# Altium PCB PCB1.PcbDoc (part 1 of 2)
Units mm, origin at the board's own origin, x right, y up, seen from the top; angles counter-clockwise.
Board outline 192 x 86 mm, 2 copper layers (Top Layer, Bottom Layer), stack 1.671 mm thick; 53 components, 94 nets, 298 pads, 93 vias.
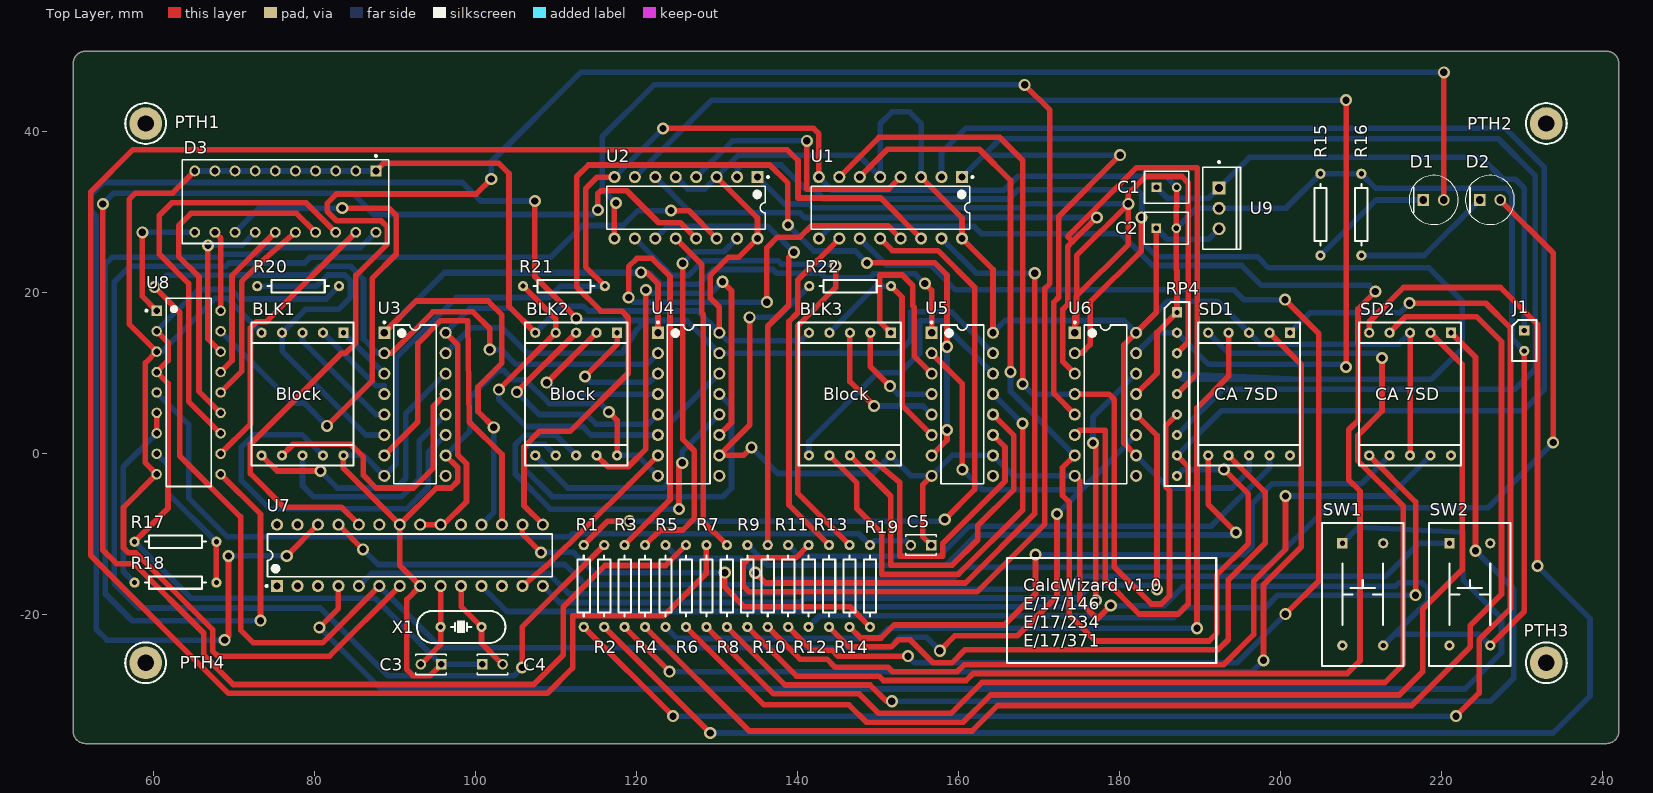
[diagram p0: Top Layer view]
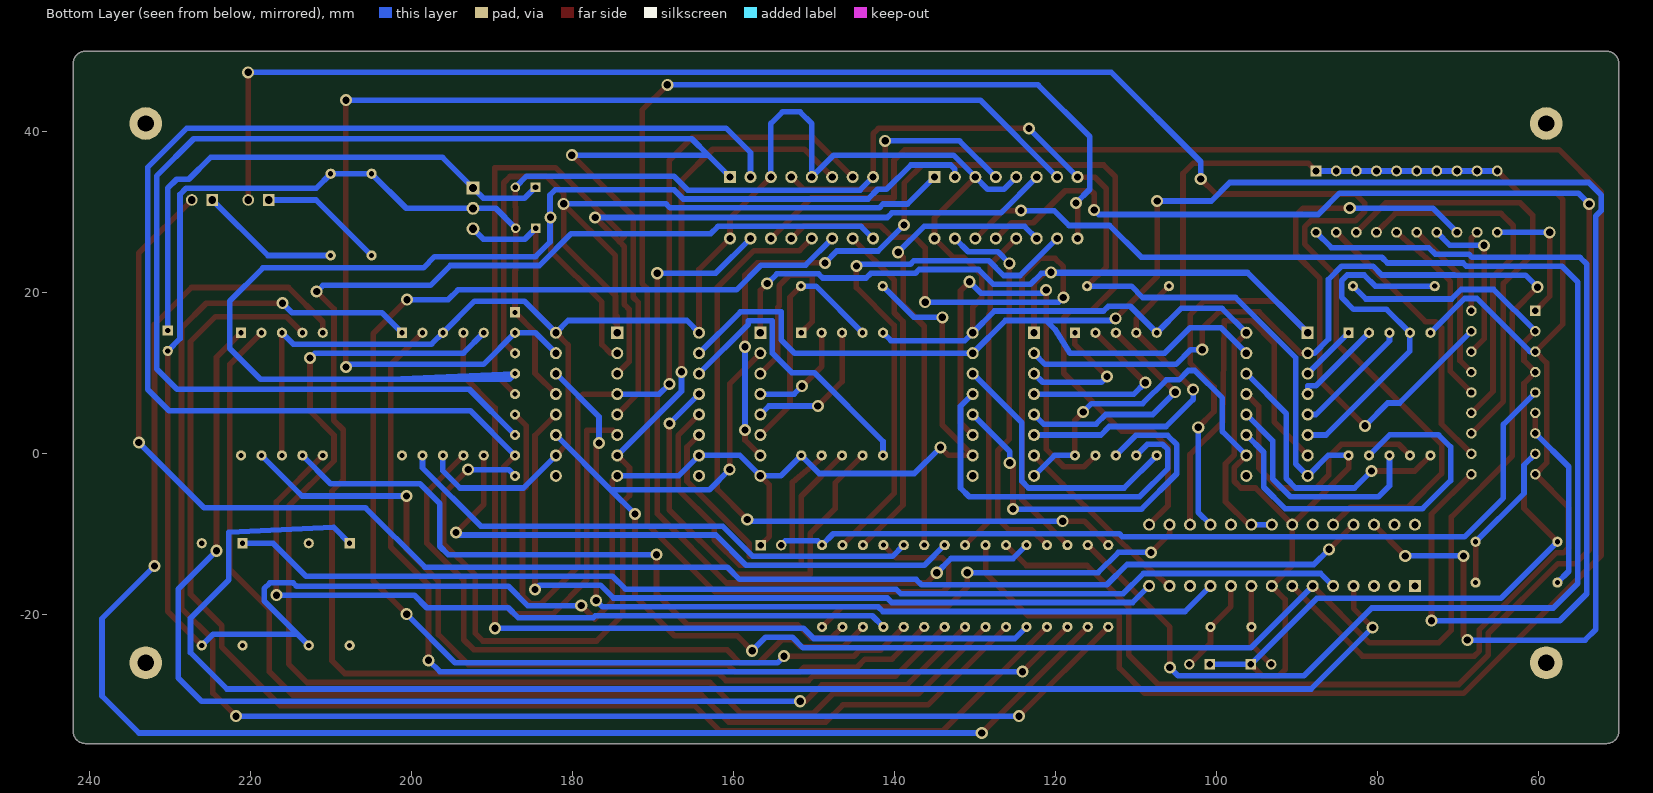
[diagram p1: Bottom Layer view, seen from below]

## Layer stack, top to bottom
Top Solder: solder mask 0.0102, Solder Resist, Dk 3.5
Top Layer: signal copper 0.0356
Dielectric 1: dielectric 1.6, FR-4, Dk 4.8
Bottom Layer: signal copper 0.0356
Bottom Solder: solder mask 0.0102, Solder Resist, Dk 3.5

## Board outline
50,-34.53 50,48.47 cw(c51.5,48.47) 51.5,49.97 240.5,49.97 cw(c240.5,48.47) 242,48.47 242,-34.53 cw(c240.5,-34.53) 240.5,-36.03 51.5,-36.03 cw(c51.5,-34.53)

## Design rules (kind name [scope] priority, off if disabled: settings)
Clearance [All] p1: gap=0.4 ignorepadtopadclearanceinfootprint=FALSE
PolygonConnect [All] p1: connectstyle=Relief reliefconductorwidth=0.254 reliefentries=4 polygonreliefangle="90 Angle" airgapwidth=0.254
RoutingVias [All] p1: holewidth=0.9 width=1.5 viastyle="Through Hole" minholewidth=0.9 minwidth=1.5 maxholewidth=0.9 maxwidth=1.5
SolderMaskExpansion [All] p1: expansion=0.102 istentingtop=FALSE
Width [All] p1: maxlimit=0.7 minlimit=0.7 preferedwidth=0.7
30 further rules are at their usual default settings.

## Components (designator, comment, footprint, x,y, rotation, side; value= is the part's Value field where it differs from the comment)
BLK1 "6x5 Block" BLOCK_6X5 78.48,15 r0 top locked
BLK2 "6x5 Block" BLOCK_6X5 112.48,15 r0 top locked
BLK3 "6x5 Block" BLOCK_6X5 146.48,15 r0 top locked
C1 "10uF" FP-RCE3DB-MFG 185.83,33.07 r0 top
C2 "10uF" FP-RCE3DB-MFG 185.79,27.99 r0 top
C3 "22 pF" KEMT-C315-THT-2 102.07,-26.2 r0 top
C4 "22 pF" KEMT-C315-THT-2 94.45,-26.2 r180 top
C5 "100 uF" KEMT-C315-THT-2 155.33,-11.38 r180 top
D1 "HLMP-4700" FP-HLMP-4700-MFG 219,31.5 r0 top locked
D2 "HLMP-4700" FP-HLMP-4700-MFG 226,31.5 r0 top locked
D3 "SSA-LXB10HW-GF/LP" FP-SSA-LXB10HW-GF-LP-MFG 76.35,31.29 r270 top locked
J1 "2-pin Connector" "2-PIN CONNECTOR" 230.26,15.29 r0 top
PTH1 "PCB Mounting Hole" "PTH 2MM" 59,41 r0 top locked
PTH2 "PCB Mounting Hole" "PTH 2MM" 233,41 r0 top locked
PTH3 "PCB Mounting Hole" "PTH 2MM" 233,-26 r0 top locked
PTH4 "PCB Mounting Hole" "PTH 2MM" 59,-26 r0 top
R1 "220R" CFR_400MIL 113.42,-11.38 r270 top
R2 "220R" CFR_400MIL 115.96,-21.54 r90 top
R3 "220R" CFR_400MIL 118.5,-11.38 r270 top
R4 "220R" CFR_400MIL 121.04,-21.54 r90 top
R5 "220R" CFR_400MIL 123.58,-11.38 r270 top
R6 "220R" CFR_400MIL 126.12,-21.54 r90 top
R7 "220R" CFR_400MIL 128.66,-11.38 r270 top
R8 "220R" CFR_400MIL 131.2,-21.54 r90 top
R9 "220R" CFR_400MIL 133.74,-21.54 r90 top
R10 "220R" CFR_400MIL 136.28,-21.54 r90 top
R11 "220R" CFR_400MIL 138.82,-21.54 r90 top
R12 "220R" CFR_400MIL 141.36,-21.54 r90 top
R13 "220R" CFR_400MIL 143.9,-11.38 r270 top
R14 "220R" CFR_400MIL 146.44,-21.54 r90 top
R15 "220R" CFR_400MIL 204.94,24.6 r90 top
R16 "220R" CFR_400MIL 210.02,24.6 r90 top
R17 "3K3" CFR_400MIL 67.78,-10.96 r180 top
R18 "2K2" CFR_400MIL 67.78,-16.04 r180 top
R19 "3K3" CFR_400MIL 148.98,-21.54 r90 top
R20 "3K3" CFR_400MIL 72.86,20.79 r0 top
R21 "3K3" CFR_400MIL 105.88,20.79 r0 top
R22 "3K3" CFR_400MIL 151.6,20.79 r180 top
RP4 "Resistor Pack 1k x 8" "RESISTOR PACK 1K X 8" 187.12,17.54 r0 top
SD1 "CA 7SD" "CA 7SD" 196.08,15 r0 top locked
SD2 "CA 7SD" "CA 7SD" 216.08,15 r0 top locked
SW1 "SPST (KRS-1273B-R)" "SPST KRS-1273B-R" 207.66,-11.15 r0 top locked
SW2 "SPST (KRS-1273B-R)" "SPST KRS-1273B-R" 220.96,-11.15 r0 top locked
U1 "SN74LS47N" N0016A 151.52,30.53 r270 top
U2 "SN74LS47N" N0016A 126.12,30.53 r270 top
U3 "SN74LS165AN" N0016A 92.45,6.11 r0 top
U4 "SN74LS165AN" N0016A 126.45,6.11 r0 top
U5 "SN74LS165AN" N0016A 160.45,6.11 r0 top
U6 "SN74HC595N" N0016A 178.23,6.11 r0 top
U7 "ATmega328P-PU" 28P3 91.83,-12.65 r90 top
U8 "LM3914N-1" FP-NFK0018A-MFG 64.331,7.58 r0 top
U9 "LM7805CT" FAIR-TO-220-3 192.35,30.46 r0 top
X1 "16 MHz Crystal" "CRYSTAL OSC TH" 95.64,-21.54 r0 top

## Footprints (in the part's own frame and the unit in brackets; to place one, negate y for a bottom-side part, rotate by r counter-clockwise, add the part's x,y. Pads: shape width x height; smd on the part's side, far side on the other; paste and mask are expansions set on the pad)
"2-PIN CONNECTOR" [mm]
  rect 1.27x1.27 hole 0.635: 1(0,0)
  round 1.27 hole 0.635: 2(0,-2.54)
  silkscreen extent -1.52,-3.81 1.52,1.27
28P3 [mm] "28-Pin Plastic Dual In-Line Package (PDIP)"
  rect 1.5x1.5 hole 0.9: 1(-3.81,16.51)
  round 1.5 hole 0.9: 2(-3.81,13.97) 3(-3.81,11.43) 4(-3.81,8.89) 5(-3.81,6.35) 6(-3.81,3.81) 7(-3.81,1.27) 8(-3.81,-1.27) 9(-3.81,-3.81) 10(-3.81,-6.35) 11(-3.81,-8.89) 12(-3.81,-11.43) 13(-3.81,-13.97) 14(-3.81,-16.51) 15(3.81,-16.51) 16(3.81,-13.97) 17(3.81,-11.43) 18(3.81,-8.89) 19(3.81,-6.35) 20(3.81,-3.81) 21(3.81,-1.27) 22(3.81,1.27) 23(3.81,3.81) 24(3.81,6.35) 25(3.81,8.89) 26(3.81,11.43) 27(3.81,13.97) 28(3.81,16.51)
  silkscreen extent -3.93,-17.7 2.65,17.93, body extent -3.6,-17.65 3.6,17.65, height 4.58
BLOCK_6X5 [mm]
  rect 1.27x1.27 hole 0.635: 1(5.08,0)
  round 1.27 hole 0.635: 2(2.54,0) 3(0,0) 4(-2.54,0) 5(-5.08,0) 6(-5.08,-15.24) 7(-2.54,-15.24) 8(0,-15.24) 9(2.54,-15.24) 10(5.08,-15.24)
  silkscreen extent -6.35,-16.51 6.35,1.27
"CA 7SD" [mil]
  rect 50x50 hole 25: 1(200,0)
  round 50 hole 25: 2(100,0) 3(0,0) 4(-100,0) 5(-200,0) 6(-200,-600) 7(-100,-600) 8(0,-600) 9(100,-600) 10(200,-600)
  silkscreen extent -250,-650 250,50
CFR_400MIL [mm]
  round 1.27 hole 0.635: 1(0,0) 2(10.16,0)
  silkscreen extent 1.27,-0.76 8.89,0.76
"CRYSTAL OSC TH" [mm]
  round 1.27 hole 0.635: 1(0,0) 2(5.08,0)
  silkscreen extent -2.96,-2 8.04,2
FAIR-TO-220-3 [mm] "FM, 3-Leads, Body 10.2x4.7mm, Pitch 2.54mm"
  rect 1.6x1.6 hole 1: 1(0,2.54)
  round 1.6 hole 1: 2(0,0) 3(0,-2.54)
  silkscreen extent -2.04,-5.1 2.66,5.87, body extent -2.04,-5.1 2.66,5.1, height 18.95
FP-HLMP-4700-MFG [mm]
  rect 1.45x1.45 hole 0.95 paste-1000 mask+0: 1(-1.27,0)
  round 1.45 hole 0.95 paste-1000 mask+0: 2(1.27,0)
  silkscreen extent -3.05,-3.05 3.05,3.05, body extent -3.15,-3.15 3.15,3.15, height 0.25
FP-NFK0018A-MFG [mm]
  rect 1.3x1.3 hole 0.8 paste-1000 mask+0: 1(-3.969,10.16)
  round 1.3 hole 0.8 paste-1000 mask+0: 2(-3.969,7.62) 3(-3.969,5.08) 4(-3.969,2.54) 5(-3.969,0) 6(-3.969,-2.54) 7(-3.969,-5.08) 8(-3.969,-7.62) 9(-3.969,-10.16) 10(3.969,-10.16) 11(3.969,-7.62) 12(3.969,-5.08) 13(3.969,-2.54) 14(3.969,0) 15(3.969,2.54) 16(3.969,5.08) 17(3.969,7.62) 18(3.969,10.16)
  silkscreen extent -5.37,-11.68 2.8,11.68, body extent -4.72,-12.04 4.72,12.04, height 0.25
FP-RCE3DB-MFG [mm]
  rect 1.2x1.2 hole 0.7 paste-1000 mask+0: 1(-1.25,0)
  round 1.2 hole 0.7 paste-1000 mask+0: 2(1.25,0)
  silkscreen extent -2.75,-2 2.75,2, body extent -2.85,-2.1 2.85,2.1, height 0.25
FP-SSA-LXB10HW-GF-LP-MFG [mm]
  rect 1.35x1.35 hole 0.85 paste-1000 mask+0: 1(-3.81,11.25)
  round 1.35 hole 0.85 paste-1000 mask+0: 2(-3.81,8.75) 3(-3.81,6.25) 4(-3.81,3.75) 5(-3.81,1.25) 6(-3.81,-1.25) 7(-3.81,-3.75) 8(-3.81,-6.25) 9(-3.81,-8.75) 10(-3.81,-11.25) 11(3.81,-11.25) 12(3.81,-8.75) 13(3.81,-6.25) 14(3.81,-3.75) 15(3.81,-1.25) 16(3.81,1.25) 17(3.81,3.75) 18(3.81,6.25) 19(3.81,8.75) 20(3.81,11.25)
  silkscreen extent -5.8,-12.83 5.2,12.82, body extent -5.31,-12.93 5.31,12.93, height 0.25
KEMT-C315-THT-2 [mm] "THD, 2-Leads, Body 3.81x2.54mm"
  rect 1.3x1.3 hole 0.8: 1(-1.27,0)
  round 1.3 hole 0.8: 2(1.27,0)
  silkscreen extent -1.9,-1.27 1.91,1.27, body extent -1.91,-1.27 1.91,1.27, height 4.66
N0016A [mm] "DIP, 16-Leads, Body 19.7x6.6mm, Pitch 2.54mm"
  rect 1.5x1.5 hole 0.9: 1(-3.81,8.89)
  round 1.5 hole 0.9: 2(-3.81,6.35) 3(-3.81,3.81) 4(-3.81,1.27) 5(-3.81,-1.27) 6(-3.81,-3.81) 7(-3.81,-6.35) 8(-3.81,-8.89) 9(3.81,-8.89) 10(3.81,-6.35) 11(3.81,-3.81) 12(3.81,-1.27) 13(3.81,1.27) 14(3.81,3.81) 15(3.81,6.35) 16(3.81,8.89)
  silkscreen extent -3.93,-9.85 2.65,10.32, body extent -3.95,-9.85 3.95,9.85, height 5.08
"PTH 2MM" [mil]
  round 160 hole 80: 1(0,0)
  silkscreen extent -100,-100 100,100
"RESISTOR PACK 1K X 8" [mm]
  rect 1.27x1.27 hole 0.635: 1(0,0)
  round 1.27 hole 0.635: 2(0,-2.54) 3(0,-5.08) 4(0,-7.62) 5(0,-10.16) 6(0,-12.7) 7(0,-15.24) 8(0,-17.78) 9(0,-20.32)
  silkscreen extent -1.52,-21.59 1.52,1.27
"SPST KRS-1273B-R" [mm]
  rect 1.27x1.27 hole 0.635: 1(0,0)
  round 1.27 hole 0.635: 2(0,-12.7) 3(5.08,-12.7) 4(5.08,0)
  silkscreen extent -2.54,-15.24 7.62,2.54

## Part data
BLK1 BLK2 BLK3: library part Block_6x5
C1 C2: library part CMP-06035-033894-1, "Cap Ceramic 10uF 25V X7R ±10% Radial 2.5mm +125°C Automotive Bulk (RCER71E106K3A2H03B)", Case/Package=Radial, Dielectric=X7R, Max Operating Temperature=125°C, Min Operating Temperature=-55°C, Package Quantity=500, Ratings=AEC-Q200, Resistor Type=Ceramic, Tolerance=10%, Voltage Rating=25V, Capacitance=10uF, Height=5mm, Height - Seated (Max)=0.197inch, Lead Diameter=0.5mm, Lead Pitch=0.098inch, Lead/Base Style=Straight, Length=0.217inch, Mount="Through Hole", Packaging=Bulk, Termination=Radial, Voltage Rating (DC)=25V, Width=0.157inch
C3 C4: library part CMP-1664-00008-1, "Capacitor, Ceramic, 22 pF, +/-10 %, 100 V, -55 to 125 degC, 2-Pin THD, RoHS, Bulk", Case\Package=TO-220, Max Input Voltage="40 V", Max Operating Temperature="125 degC", Max Ouput Current="1.5 A", Min Input Voltage="4.2 V", Min Operating Temperature="0 degC", Output Voltage="1.2 V", Package Quantity=50, ComponentLink1Description="Manufacturer URL", ComponentLink1URL=http://www.kemet.com/, ComponentLink2Description=Datasheet, ComponentLink2URL=http://capacitoredge.kemet.com/capedge2/DataSheet/Datasheet-C315C220K1G5TA.pdf?pn=C315C220K1G5TA{BULK}, DatasheetVersion=Aug-16, Height="9.28 mm", Length="10.28 mm", Mount="Through Hole", Output Current="1.5 A", Outputs=1, PackageDescription="2-Pin Through Hole Device, Body 3.81 x 2.54 mm", PackageReference=C315-THT-2, Packaging=Rail/Tube, Pins=3, Radiation Hardening=No, REACH SVHC="No SVHC", RoHSCompliant=true, Weight="0.08113 oz", Width="4.82 mm"
C5: library part CMP-1664-00008-1, "Capacitor, Ceramic, 100 uF, +/-10 %, 100 V, -55 to 125 degC, 2-Pin THD, RoHS, Bulk", Case\Package=TO-220, Max Input Voltage="40 V", Max Operating Temperature="125 degC", Max Ouput Current="1.5 A", Min Input Voltage="4.2 V", Min Operating Temperature="0 degC", Output Voltage="1.2 V", Package Quantity=50, ComponentLink1Description="Manufacturer URL", ComponentLink1URL=http://www.kemet.com/, ComponentLink2Description=Datasheet, ComponentLink2URL=http://capacitoredge.kemet.com/capedge2/DataSheet/Datasheet-C315C220K1G5TA.pdf?pn=C315C220K1G5TA{BULK}, DatasheetVersion=Aug-16, Height="9.28 mm", Length="10.28 mm", Mount="Through Hole", Output Current="1.5 A", Outputs=1, PackageDescription="2-Pin Through Hole Device, Body 3.81 x 2.54 mm", PackageReference=C315-THT-2, Packaging=Rail/Tube, Pins=3, Radiation Hardening=No, REACH SVHC="No SVHC", RoHSCompliant=true, Weight="0.08113 oz", Width="4.82 mm"
D1 D2: library part CMP-18399-000008-1, "LED RED DIFFUSED T-1 3/4 T/H", Colour=Red, Forward Current=2mA, Forward Voltage=1.7V, Manufacturer=Broadcom, Power Dissipation=14mW, Reverse Voltage=5V, Temperature="-40°C to +100°C", Temperature Range High=+100°C, Temperature Range Low=-40°C, Automotive=No, Category=Diode, ComponentLink2Description=Datasheet, ComponentLink2URL=https://docs.broadcom.com/docs/AV02-1557EN, Device Class L1=Optoelectronics, Device Class L2=LEDs, Device Class L3=unset, Digikey Description="LED RED DIFFUSED T-1 3/4 T/H", Lead Free=Yes, Led Orientation=Straight, Luminous Intensity=2.3mcd, Manufacturer Part Number=HLMP-4700, Mouser Description="LED; Red; 2.3mcd; 0.24In.Dia.; T-1-3/4; 500mA; 1.7V; 635nm; 50deg; 5V; 24mW; -55degC;", Octopart=https://octopart.com/hlmp-4700-broadcom-71130526, Package=HLMP-4700, Peak Emmision Wavelength=635nm, RoHS=TRUE, Viewing Angle=50°, Wavelength=626nm
D3: library part CMP-57188-000001-1, "LED ARRAY 10X25MM 10SEG RED DIFF", Forward Current=20mA, Forward Voltage=2V, Manufacturer=lumex, Power Dissipation=105mW, Reverse Voltage=5V, Temperature="-40°C to +85°C", Temperature Range High=+85°C, Temperature Range Low=-40°C, Automotive=No, Category=Diode, ComponentLink2Description=Datasheet, ComponentLink2URL=https://www.lumex.com/spec/SSA-LXB10HW-GF-LP.pdf, Device Class L1=Optoelectronics, Device Class L2=Displays, Device Class L3="LED Displays", Digikey Description="LED ARRAY 10X25MM 10SEG RED DIFF", Display Type="Bar Graph", Height=7.05mm, Lead Free=Yes, Luminous Intensity=500mcd, Manufacturer Part Number=SSA-LXB10HW-GF/LP, Mouser Description="LED Bars and Arrays 10 Segment Red", Octopart=https://octopart.com/ssa-lxb10hw-gf%2Flp-lumex-548235, Package=SSA-LXB10HW-GF/LP, RoHS=TRUE, Test Current=20mA, Viewing Angle=160°
J1: library part PPTC021LFBN-RC, "Female, 2C, Straight, .100\"CC; 3.20mm Tail, No Mt. 100u\" Tin; PBT, Phos Bronze, 105 C", Color=Black, Manufacturer=Sullins, Package Quantity=1000, Supplier Part Number 1=S7000-ND, Category=Connectors, ComponentLink1Description=https://media.digikey.com/pdf/Data%20Sheets/Sullins%20PDFs/Female_Headers.100_DS.pdf?src-supplier=Digi-Key, ComponentLink1URL=https://media.digikey.com/pdf/Data%20Sheets/Sullins%20PDFs/Female_Headers.100_DS.pdf?src-supplier=Digi-Key, ComponentLink2Description=http://www.sullinscorp.com/catalogs/78_Page80-81_HEADER_.100_2.54mm_FEMALE.pdf?src-supplier=Future+Electronics, ComponentLink2URL=http://www.sullinscorp.com/catalogs/78_Page80-81_HEADER_.100_2.54mm_FEMALE.pdf?src-supplier=Future+Electronics, Connector Type=Header, Contact Material=Bronze, Contact Plating=Tin, Contact Type="Female Socket", Height=8.5mm, Housing Material=Plastic, Lead Free="Lead Free", Length=5.58mm, Manufacturer Part Number=PPTC021LFBN-RC, Mount="Through Hole", Number of Positions=2, Number of Rows=1, Packaging=Bulk, Pitch=0.1inch, Pricing 1="1=0.32000, 10=0.27500, 100=0.21390, 500=0.18332, 1000=0.15278, 5000=0.13095, 10000=0.12610 (USD)", RoHS=Yes, RoHS Compliant=Yes, Stock 1=86332, Supplier 1=Digi-Key, Termination=Solder, Width=2.5mm
PTH1 PTH2 PTH3 PTH4: library part PTH
R1 R2 R3 R4 R5 R6 R7 R8 R9 R10 R11 R12 R13 R14 R15 R16: library part CFR-25JB-52-220R, "General Type Carbon Film Resistor 220Ohm 1/4W 5% Axial Bulk", Case/Package=Axial, Manufacturer=Yageo, Max Operating Temperature=155°C, Max Power Dissipation=250mW, Min Operating Temperature=-55°C, Package Quantity=200, Resistor Type="Carbon Film", Supplier Part Number 1=220QBK-ND, Temperature Coefficient=500ppm/°C, Tolerance=5%, Category="Through-Hole Resistors", ComponentLink1Description=http://www.mouser.com/ds/2/447/Yageo%20LR_CFR_2013-540723.pdf?src-supplier=Mouser, ComponentLink1URL=http://www.mouser.com/ds/2/447/Yageo%20LR_CFR_2013-540723.pdf?src-supplier=Mouser, ComponentLink2Description=http://www.yageo.com/NewPortal/yageodocoutput?fileName=/pdf/throughhole/Yageo_LR_CFR_2013.pdf&src-supplier=Digi-Key, ComponentLink2URL=http://www.yageo.com/NewPortal/yageodocoutput?fileName=/pdf/throughhole/Yageo_LR_CFR_2013.pdf&src-supplier=Digi-Key, Length=0.248inch, Manufacturer Part Number=CFR-25JB-52-220R, Number of Terminations=2, Packaging=Bulk, Pricing 1="1=0.10000, 10=0.06800, 25=0.04680, 50=0.03640, 100=0.02600, 250=0.02028, 500=0.01612, 1000=0.01144, 5000=0.00884 (USD)", Resistance=220R, RoHS=Yes, RoHS Compliant=Yes, Series="Carbon Film", Stock 1=1583, Supplier 1=Digi-Key
R17 R19 R20 R21 R22: library part CFR-25JB-52-3K3, "General Type Carbon Film Resistor 3.3kOhm 1/4W 5% Axial Bulk", Case/Package=Axial, Manufacturer=Yageo, Manufacturer Part Number=CFR-25JB-52-220R, Max Operating Temperature=155°C, Max Power Dissipation=250mW, Min Operating Temperature=-55°C, Package Quantity=200, Resistance=220R, Resistor Type="Carbon Film", Supplier Part Number 1=220QBK-ND, Temperature Coefficient=500ppm/°C, Tolerance=5%, Category="Through-Hole Resistors", ComponentLink1Description=http://www.mouser.com/ds/2/447/Yageo%20LR_CFR_2013-540723.pdf?src-supplier=Mouser, ComponentLink1URL=http://www.mouser.com/ds/2/447/Yageo%20LR_CFR_2013-540723.pdf?src-supplier=Mouser, ComponentLink2Description=http://www.yageo.com/NewPortal/yageodocoutput?fileName=/pdf/throughhole/Yageo_LR_CFR_2013.pdf&src-supplier=Digi-Key, ComponentLink2URL=http://www.yageo.com/NewPortal/yageodocoutput?fileName=/pdf/throughhole/Yageo_LR_CFR_2013.pdf&src-supplier=Digi-Key, Length=0.248inch, Number of Terminations=2, Packaging=Bulk, Pricing 1="1=0.10000, 10=0.06800, 25=0.04680, 50=0.03640, 100=0.02600, 250=0.02028, 500=0.01612, 1000=0.01144, 5000=0.00884 (USD)", RoHS=Yes, RoHS Compliant=Yes, Series="Carbon Film", Stock 1=1583, Supplier 1=Digi-Key
R18: library part CFR-25JB-52-2K2, "General Type Carbon Film Resistor 2.2kOhm 1/4W 5% Axial Bulk", Case/Package=Axial, Manufacturer=Yageo, Manufacturer Part Number=CFR-25JB-52-220R, Max Operating Temperature=155°C, Max Power Dissipation=250mW, Min Operating Temperature=-55°C, Package Quantity=200, Resistance=220R, Resistor Type="Carbon Film", Supplier Part Number 1=220QBK-ND, Temperature Coefficient=500ppm/°C, Tolerance=5%, Category="Through-Hole Resistors", ComponentLink1Description=http://www.mouser.com/ds/2/447/Yageo%20LR_CFR_2013-540723.pdf?src-supplier=Mouser, ComponentLink1URL=http://www.mouser.com/ds/2/447/Yageo%20LR_CFR_2013-540723.pdf?src-supplier=Mouser, ComponentLink2Description=http://www.yageo.com/NewPortal/yageodocoutput?fileName=/pdf/throughhole/Yageo_LR_CFR_2013.pdf&src-supplier=Digi-Key, ComponentLink2URL=http://www.yageo.com/NewPortal/yageodocoutput?fileName=/pdf/throughhole/Yageo_LR_CFR_2013.pdf&src-supplier=Digi-Key, Length=0.248inch, Number of Terminations=2, Packaging=Bulk, Pricing 1="1=0.10000, 10=0.06800, 25=0.04680, 50=0.03640, 100=0.02600, 250=0.02028, 500=0.01612, 1000=0.01144, 5000=0.00884 (USD)", RoHS=Yes, RoHS Compliant=Yes, Series="Carbon Film", Stock 1=1583, Supplier 1=Digi-Key
RP4: library part 4309R-101-102LF, "Res Thick Film NET 1K Ohm 2% 1.13W ±100ppm/°C BUS Molded 9-Pin SIP Pin Thru-Hole", Case/Package=SIP, Manufacturer=Bourns, Max Operating Temperature=125°C, Min Operating Temperature=-55°C, Number of Resistors=8, Package Quantity=22, Power Per Element=200mW, Power Rating=1.13W, Resistance=1kR, Resistance Tolerance=2%, Supplier Part Number 1=32K9075, Temperature Coefficient=100ppm/°C, Voltage Rating=100V, Category="Resistor Arrays", Circuit Type=Bussed, ComponentLink1Description=https://datasheet.ciiva.com/1132/1639105-1132861.pdf?src-supplier=Element14, ComponentLink1URL=https://datasheet.ciiva.com/1132/1639105-1132861.pdf?src-supplier=Element14, ComponentLink2Description=https://datasheet.ciiva.com/3264/4300r-3264093.pdf?src-supplier=Avnet, ComponentLink2URL=https://datasheet.ciiva.com/3264/4300r-3264093.pdf?src-supplier=Avnet, ComponentLink3Description=https://datasheet.ciiva.com/6494/4300r-6494366.pdf?src-supplier=Digi-Key, ComponentLink3URL=https://datasheet.ciiva.com/6494/4300r-6494366.pdf?src-supplier=Digi-Key, ComponentLink4Description=https://datasheet.ciiva.com/14583/70154247-14583487.pdf?src-supplier=Allied+Electronics, ComponentLink4URL=https://datasheet.ciiva.com/14583/70154247-14583487.pdf?src-supplier=Allied+Electronics, Depth=2.16mm, Height=0.195inch, Lead Pitch=2.54mm, Length=0.884inch, Manufacturer Part Number=4309R-101-102LF, Military Standard=Not, Mount="Through Hole", Number of Elements=8, Number of Pins=9, Number of Terminals/Pins=9, Packaging=Rail/Tube, Pricing 1="1=1.42000 (USD)", Radiation Hardening=No, Reach SVHC Compliant=Yes, RoHS=Yes, RoHS Compliant=Yes, Series=4300R, Stock 1=21, Supplier 1=Avnet, Technology="THICK FILM", Terminal Pitch=2.54mm, Termination=SIP, Tolerance=2%, Voltage Rating (DC)=100V, Width=0.085inch
SD1 SD2: library part LDS-A5642RI, "Single Digit Seven Segment Green 0.56\" Common Anode Through Hole LED Display", Case/Package=DIP, Color=Green, Forward Current=10mA, Forward Voltage=2.2V, Manufacturer=Lumex, Max Operating Temperature=85°C, Max Power Dissipation=105mW, Min Operating Temperature=-40°C, Package Quantity=40, Supplier Part Number 1=8628562, Category="LED Displays", ComponentLink1Description=https://datasheet.ciiva.com/16294/lds-a5642ri-16294404.pdf?src-supplier=Future+Electronics, ComponentLink1URL=https://datasheet.ciiva.com/16294/lds-a5642ri-16294404.pdf?src-supplier=Future+Electronics, ComponentLink2Description=https://datasheet.ciiva.com/4421/lds-a5642ri-33718-4421941.pdf?src-supplier=Mouser, ComponentLink2URL=https://datasheet.ciiva.com/4421/lds-a5642ri-33718-4421941.pdf?src-supplier=Mouser, ComponentLink3Description=https://datasheet.ciiva.com/30079/lds-a5642ri-30079851.pdf?src-supplier=Onlinecomponents.com, ComponentLink3URL=https://datasheet.ciiva.com/30079/lds-a5642ri-30079851.pdf?src-supplier=Onlinecomponents.com, Display Type=Segment, Element Configuration="Common Anode", Height=0.32inch, Illumination Color=Green, Lead Free="Lead Free", Length=0.67inch, Luminous Intensity=3.9mcd, Manufacturer Part Number=LDS-A5642RI, Mount="Through Hole", Number of Contacts=10, Number of LEDs=8, Number of Pins=10, Operating Supply Voltage=2.2V, Packaging=Bulk, Power Consumption=105mW, Pricing 1="1=0.91500, 50=0.88000, 200=0.84000, 750=0.80500, 2500=0.74000 (USD)", RoHS=Yes, RoHS Compliant=Yes, Supplier 1="Future Electronics", Test Current=10mA, Viewing Area (height)=14.2mm, Wavelength=565nm, Width=0.5inch
SW1 SW2: library part KRS-1273B-R, "Switch Push Button Tactile Off Momentary (On) Single Pole Single Throw Cap: 155389 155409", Manufacturer="Jameco Valuepro", Supplier Part Number 1=155380, Category=Uncategorized, ComponentLink1Description=https://datasheet.ciiva.com/19453/155380-19453382.pdf?src-supplier=Jameco, ComponentLink1URL=https://datasheet.ciiva.com/19453/155380-19453382.pdf?src-supplier=Jameco, Manufacturer Part Number=KRS-1273B-R, Number of Pins=4, Orientation=Straight, Pricing 1="1=0.45000, 10=0.39000, 100=0.35000, 250=0.29000 (USD)", RoHS=No, Stock 1=2143, Supplier 1=Jameco, Termination="PC Pins", Throw Configuration=SPST
U1 U2: library part CMP-0388-00303-2, "BCD-to-7-Segment Decoder / Driver, 4.75 to 5.25 V, 0 to 70 degC, 16-pin DIP (N16), Pb-Free (RoHS)", Manufacturer="Texas Instruments", Rating=Catalog, Code_JEDEC=MS-001, ComponentLink1Description="Manufacturer URL", ComponentLink1URL=http://www.ti.com/, ComponentLink2Description=Datasheet, ComponentLink2URL=http://www.ti.com/general/docs/lit/getliterature.tsp?genericPartNumber=SN74LS47&fileType=pdf, ComponentLink3Description="Package Specification", ComponentLink3URL=http://www.ti.com/litv/pdf/mpdi002c, DatasheetVersion=SDLS111, Eco-Plan="Pb-Free (RoHS)", Mounting Technology="Through Hole", PackageDescription="16-Pin Plastic In-Line, Body 19.305 x 6.35 mm, Pitch 2.54 mm", PackageReference=N0016A, PackageVersion=4040049/E, PartNumber=SN74LS47N, SubFamily="Discrete Segment LED Driver", Vin(Max)(V)=5.25, Vin(Min)(V)=4.75
U3 U4 U5: library part CMP-0780-00134-3, "Serial-out shift registers, N0016A, TUBE", F @ Nom Voltage(Max)(Mhz)=35, Generic Part Number=SN74LS165A, ICC @ Nom Voltage(Max)(mA)=30, Manufacturer="Texas Instruments", Operating Temperature Range(C)="0 to 70", Rating=Catalog, tpd @ Nom Voltage(Max)(ns)=25, Voltage(Nom)(V)=5, 3-State Output=No, Bits=8, Code_JEDEC=MS-001, DatasheetVersion=SDLS062D, Input Type=TTL, Output Drive (IOL/IOH)(Max)(mA)=8/-0.4, Output Type=TTL, PackageReference=N0016A, PackageVersion=http://www.ti.com/lit/ml/mpdi002c/mpdi002c.pdf, Technology Family=LS, VCC(Max)(V)=5.25, VCC(Min)(V)=4.75
U6: library part CMP-0780-00137-3, "8-Bit Shift Registers With 3-State Output Registers, N0016A, TUBE", F @ Nom Voltage(Max)(Mhz)=28, Generic Part Number=SN74HC595, ICC @ Nom Voltage(Max)(mA)=0.08, Manufacturer="Texas Instruments", Operating Temperature Range(C)="-40 to 85", Rating=Military, tpd @ Nom Voltage(Max)(ns)=34, Voltage(Nom)(V)=6, 3-State Output=Yes, Bits=8, Code_JEDEC=MS-001, DatasheetVersion=SCLS041H, Input Type=CMOS, Output Drive (IOL/IOH)(Max)(mA)=7.8/-7.8, Output Type=CMOS, PackageReference=N0016A, PackageVersion=http://www.ti.com/lit/ml/mpdi002c/mpdi002c.pdf, Technology Family=HC, VCC(Max)(V)=6, VCC(Min)(V)=2
U7: library part CMP-0095-00013-2, "8-bit AVR Microcontroller, 32KB Flash, 1KB EEPROM, 2KB SRAM, 28-pin PDIP, Industrial Grade (-40°C to 85°C)", ComponentLink1Description="Manufacturer URL", ComponentLink1URL=http://www.atmel.com/, ComponentLink2Description="ATmega48A/48PA/88A/88PA/168A/168PA/328/328P Datasheet", ComponentLink2URL=http://www.atmel.com/dyn/resources/prod_documents/8271.pdf, ComponentLink3Description="ATmega48A/48PA/88A/88PA/168A/168PA/328/328P Summary", ComponentLink3URL=http://www.atmel.com/dyn/resources/prod_documents/8271S.pdf, DatasheetVersion="revD, May-2011", PackageDescription="28-lead (0.300\"/7.62mm Wide) Plastic Dual Inline Package (PDIP)", PackageReference=28P3, PackageVersion="revB, Sep-2001", RevisionNote="DatasheetVersion updated. URLs added."
U8: library part CMP-0058-00006-4, "IC DRVR DOT/BAR DISPLAY 18DIP", Case/Package=DIP, Max Input Voltage=12V, Max Operating Temperature=70°C, Max Output Voltage=1.34V, Max Power Dissipation=1.365W, Max Supply Current=9.2kA, Max Supply Voltage=25V, Min Input Voltage=1.2V, Min Operating Temperature=0°C, Nominal Supply Current=9.2mA, Operating Supply Current=6.1mA, Output Current=30mA, Output Voltage=1.28V, Package Quantity=20, Height=3.3mm, Lead Free="Contains Lead", Length=22.86mm, Mount="Through Hole", Number of Channels=10, Number of Outputs=10, Number of Pins=18, Number of Segments=10, Packaging=Rail/Tube, Power Dissipation=1.365W, Radiation Hardening=No, REACH SVHC="No SVHC", RoHS Compliant=No, Series=-, Supply Current=9.2mA, Termination="Through Hole", Width=6.35mm
U9: library part CMP-2000-04938-1, "Positive Voltage Regulator, 5 V, 1 A, -40 to 125 degC, 3-Pin TO-220, RoHS, Tube", Manufacturer=FairchildSemiconductor, Maximum Input Voltage=35V, Maximum Output Current=2.2(Typ)A, Maximum Quiescent Current=8mA, Operating Temperature=-40to125degC, Output Voltage=5V, Package=3TO-220AB, Package Description="3-Pin Through Hole Device, Body 10 x 4.5 mm, Pitch 2.54 mm", Package Reference=TO-220, Typical Dropout Voltage @ Current=2@1AV, Accuracy=±4%, Category=LinearRegulator, Datasheet URL=https://datasheet.ciiva.com/26904/lm7805ct-26904988.pdf, Datasheet Version=Aug-12, Line Regulation=100mV, Load Regulation=100mV, Manufacturer URL=https://www.fairchildsemi.com/, Mounting=ThroughHole, Number of Outputs=1, Output Type=Fixed, Package URL=https://www.fairchildsemi.com/package-drawings/TO/TO220B03.pdf, Packaging=Rail/Tube, Polarity=Positive, Rad Hard=No, Type=Linear
X1: library part 9B-16.000MBBK-B, "Crystal 16MHz ±50ppm (Tol) ±50ppm (Stability) 20pF FUND 30Ohm 2-Pin DIP HC-49/S Thru-Hole Bulk", Case/Package=Metal, ESR (Equivalent Series Resistance)=30R, Frequency=16MHz, Frequency Stability=50ppm, Load Capacitance=20pF, Manufacturer=TXC, Max Operating Temperature=70°C, Min Operating Temperature=-20°C, Package Quantity=1000, Category=Crystals, ComponentLink1Description=https://datasheet.ciiva.com/6733/9b-6733741.pdf?src-supplier=Digi-Key, ComponentLink1URL=https://datasheet.ciiva.com/6733/9b-6733741.pdf?src-supplier=Digi-Key, Depth=5mm, Frequency Tolerance=50ppm, Height=0.145inch, Length=0.453inch, Manufacturer Part Number=9B-16.000MBBK-B, Mount="Through Hole", Number of Pins=2, Packaging=Bulk, Pricing 1="1=0.20360, 10=0.18510, 50=0.17410, 100=0.16200, 500=0.15620, 1000=0.13970 (USD)", RoHS=Yes, Stock 1=932, Supplier 1="Arrow Electronics", Supplier Part Number 1=9B-16.000MBBK-B, Width=0.197inch

## Via types
v1: diameter 1.5, hole 0.9, Top Layer to Bottom Layer, 93 vias

## Nets (pads, with @x,y where several pads share a name; then routed paths per layer and width w, separated by ;. In a path a pad name is that pad's centre, name@x,y a point inside that pad or via, vN(x,y) a via of type N, cw(c..) or ccw(c..) an arc to the next point about the centre after c; other vN are vias at no path point)
GND: BLK1.10 BLK2.10 BLK3.10 C1.2 C2.2 C3.1 C4.1 C5.1 J1.2 R15.2 R16.2 R17.2 R20.2 R21.2 R22.2 RP4.1 SW1.3 SW2.3 U1.8 U2.8 U3.8 U3.10 U4.8 U4.10 U5.8 U5.10 U6.8 U6.13 U7.8 U7.22 U8.2 U8.4 U9.2 | length 647.3
  Top Layer w0.7: R17.2 61.773,-6.807 61.773,8.71 U8.4 61.773,11.53 61.773,13.79 U8.2 ; BLK1.10 83.56,-1.84 U7.22 ; C4.1 94.32,-27.6 92.197,-27.6 91.44,-26.843 91.44,-18.12 U7.8 90.56,-13.92 U7.22 ; U3.10 97.76,-1.74 97.76,-3.45 96.93,-4.28 95.12,-4.28 U7.22 ; R21.2 113.654,23.176 113.654,32.894 115.1,34.34 U2.8 ; v1(116.535,5.161) 117.56,4.136 BLK2.10 ; v1(123.28,40.39) 141.97,40.39 142.63,39.73 U1.8 ; v1(134.036,16.921) 134.036,3.536 U4.10 133.258,-0.24 v1(134.264,0.766) ; C5.1 155.52,-10.3 155.52,-3.9 U5.8 ; U6.8 175.031,-3.391 175.031,-18.385 177.216,-20.57 v1(178.892,-18.893) ; U6.13 184.633,9.973 184.633,15.053 RP4.1 187.12,22.712 187.04,22.792 C2.2 187.04,30.62 187.08,30.66 C1.2 ; SW2.3 230.26,-19.63 J1.2
  Bottom Layer w0.7: R17.2 64.639,-17.979 87.499,-17.979 C4.1 C3.1 ; U8.2 65.538,20.375 69.58,20.375 70.765,19.19 81.42,19.19 R20.2 ; BLK1.10 86.1,-0.24 U3.8 90.14,-1.28 90.14,11.912 97.612,19.385 109.144,19.385 110.549,20.79 R21.2 ; U3.10 99.238,2.738 99.238,6.888 102.667,10.317 103.48,10.317 104.648,9.148 106.197,9.148 109.144,6.202 115.494,6.202 v1(116.535,5.161) ; U2.8 v1(123.28,40.39) ; BLK2.10 120.1,-0.24 U4.8 ; v1(134.036,16.921) 137.571,16.921 R22.2 ; v1(134.264,0.766) 137.516,-2.485 149.315,-2.485 BLK3.10 154.1,-2.78 U5.8 159.18,-0.24 U5.10 166.8,-2.78 U6.8 ; U1.8 144.248,32.722 165.661,32.722 167.402,34.463 185.687,34.463 C1.2 ; v1(178.892,-18.893) 185.547,-18.893 187.96,-16.48 214.274,-16.48 214.681,-16.074 217.576,-16.074 218.288,-16.785 218.288,-18.302 214.141,-22.449 ; C2.2 189.51,30.46 U9.2 200.64,30.46 R15.2 R16.2 211.805,32.975 227.965,32.975 228.745,32.195 228.745,14.265 J1.2 ; SW1.3 214.141,-22.449 ; SW2.3 224.639,-22.449 214.141,-22.449
IO6: U1.4 U2.4 | length 33.9
  Top Layer w0.7: v1(141.13,38.841) 141.13,32.84 151.29,32.84 U1.4
  Bottom Layer w0.7: U2.4 131.891,38.841 v1(141.13,38.841)
IO11: U3.7 U7.17 | length 50
  Top Layer w0.7: U3.7 92.819,3.939 92.819,13.68 95.639,16.5 99.009,16.5 99.178,3.951 103.26,-0.132 U7.17
NetBLK1_1: BLK1.1 U3.3 | length 7.2
  Bottom Layer w0.7: BLK1.1 U3.3
NetBLK1_2: BLK1.2 U3.4 | length 11.4
  Bottom Layer w0.7: BLK1.2 87.608,8.412 88.64,8.412 U3.4
NetBLK1_3: BLK1.3 U3.5 | length 15
  Bottom Layer w0.7: BLK1.3 78.48,13.99 87.63,4.84 U3.5
NetBLK1_4: BLK1.4 R20.1 U3.6 | length 44.1
  Bottom Layer w0.7: R20.1 80.25,20.79 81.635,22.175 83.722,22.175 84.43,21.467 84.43,19.41 82.931,17.911 78.851,17.911 BLK1.4 75.94,12.72 86.36,2.3 U3.6
NetBLK1_6: BLK1.6 U3.14 | length 35.2
  Top Layer w0.7: BLK1.6 75.34,-2.18 v1(80.721,-2.18)
  Bottom Layer w0.7: v1(80.721,-2.18) 82.821,-4.28 90.145,-4.28 91.313,-3.112 91.313,4.973 U3.14
NetBLK1_7: BLK1.7 U3.13 | length 33.8
  Top Layer w0.7: BLK1.7 77.327,1.147 84.455,1.147 86.047,-0.445 86.047,-2.705 87.63,-4.288 92.253,-4.288 94.742,-1.799 94.742,5.862 U3.13
NetBLK1_8: BLK1.8 U3.12 | length 29.1
  Bottom Layer w0.7: BLK1.8 78.48,-4.014 79.846,-5.38 90.78,-5.38 92.989,-3.171 92.989,1.569 U3.12
NetBLK1_9: BLK1.9 U3.11 | length 49.1
  Bottom Layer w0.7: BLK1.9 78.464,2.316 72.39,2.316 70.891,0.817 70.891,-3.374 74.371,-6.854 91.44,-6.854 94.107,-4.187 94.107,0.147 U3.11
NetBLK2_1: BLK2.1 U4.3 | length 16.9
  Top Layer w0.7: v1(113.563,9.555) 117.56,13.551 BLK2.1
  Bottom Layer w0.7: v1(113.563,9.555) 114.275,8.844 121.564,8.844 U4.3
NetBLK2_2: BLK2.2 U4.4 | length 23.2
  Top Layer w0.7: v1(108.815,8.795) BLK2.2
  Bottom Layer w0.7: v1(108.815,8.795) 110.229,7.38 U4.4
NetBLK2_3: BLK2.3 U4.5 | length 30.1
  Top Layer w0.7: v1(105.102,7.622) BLK2.3
  Bottom Layer w0.7: v1(105.102,7.622) 107.883,4.84 113.732,4.84 114.929,3.643 121.443,3.643 U4.5
NetBLK2_4: BLK2.4 R21.1 U4.6 | length 40.3
  Top Layer w0.7: v1(102.87,7.93) BLK2.4 109.94,16.73 R21.1
  Bottom Layer w0.7: v1(102.87,7.93) 102.87,6.714 106.239,3.345 113.289,3.345 114.334,2.3 U4.6
NetBLK2_6: BLK2.6 U4.14 | length 34.7
  Bottom Layer w0.7: BLK2.6 111.44,-4.28 123.324,-4.28 124.154,-3.45 124.154,3.814 U4.14
NetBLK2_7: BLK2.7 U4.13 | length 47.1
  Bottom Layer w0.7: BLK2.7 108.555,1.145 106.68,1.145 106.015,0.48 106.015,-1.871 109.525,-5.38 130.683,-5.38 131.775,-4.288 131.775,5.865 U4.13
NetBLK2_8: BLK2.8 U4.12 | length 48.7
  Top Layer w0.7: v1(125.247,-6.904) 125.247,-1.57 v1(125.654,-1.164)
  Bottom Layer w0.7: BLK2.8 109.995,2.245 106.045,2.245 104.915,1.115 104.915,-2.523 109.296,-6.904 v1(125.247,-6.904) ; v1(125.654,-1.164) 125.654,0.234 U4.12
NetBLK2_9: BLK2.9 U4.11 | length 57.8
  Top Layer w0.7: BLK2.9 116.427,-1.647 118.948,-1.647 121.133,0.538 v1(121.133,20.299) ; U4.11 131.775,3.815 131.775,20.223 v1(130.658,21.34)
  Bottom Layer w0.7: v1(121.133,20.299) 121.525,19.906 129.223,19.906 v1(130.658,21.34)
NetBLK3_1: BLK3.1 U5.3 | length 24.3
  Top Layer w0.7: BLK3.1 150.215,16.345 150.215,22.175 152.985,22.175 154.29,20.87 154.29,18.342 154.457,18.174 154.457,12.103 U5.3
NetBLK3_2: BLK3.2 U5.4 | length 13.2
  Top Layer w0.7: BLK3.2 149.02,10.801 v1(151.46,8.361)
  Bottom Layer w0.7: v1(151.46,8.361) 152.441,7.38 U5.4
NetBLK3_3: BLK3.3 U5.5 | length 17.9
  Top Layer w0.7: BLK3.3 146.48,8.922 v1(149.504,5.897)
  Bottom Layer w0.7: v1(149.504,5.897) 155.583,5.897 U5.5
NetBLK3_4: BLK3.4 R22.1 U5.6 | length 30.6
  Top Layer w0.7: R22.1 152.96,19.43 152.96,5.98 U5.6
  Bottom Layer w0.7: BLK3.4 149.73,20.79 R22.1
NetBLK3_6: BLK3.6 U5.14 | length 36.2
  Bottom Layer w0.7: BLK3.6 141.4,1.501 149.941,10.042 152.732,10.042 155.14,12.45 155.14,16.5 158.14,16.5 158.14,16.04 U5.14
NetBLK3_7: BLK3.7 U5.13 | length 54.2
  Top Layer w0.7: BLK3.7 147.351,-3.651 147.351,-6.863 150.46,-9.972 150.46,-14.98 159.986,-14.98 167.96,-7.006 167.96,3.68 v1(167.919,3.721)
  Bottom Layer w0.7: U5.13 v1(167.919,3.721)
NetBLK3_8: BLK3.8 U5.12 | length 46.3
  Top Layer w0.7: BLK3.8 151.56,-5.32 151.56,-13.88 159.191,-13.88 162.362,-10.709 162.362,-8.964 166.86,-4.465 166.86,2.24 U5.12
NetBLK3_9: BLK3.9 U5.11 | length 38.5
  Top Layer w0.7: BLK3.9 149.02,-0.525 152.66,-3.576 152.66,-12.78 158.013,-12.78 158.013,-11.197 165.76,-3.45 165.76,0.8 U5.11
NetC1_1: C1.1 J1.1 U9.1 | length 67.6
  Bottom Layer w0.7: C1.1 185.946,31.704 191.054,31.704 U9.1 196.134,36.784 224.942,36.784 227.651,34.075 229.15,34.075 230.26,32.965 J1.1
NetC3_2: C3.2 U7.10 X1.2 | length 11.9
  Top Layer w0.7: U7.10 98.18,-19 X1.2 100.72,-23.58 C3.2
NetC4_2: C4.2 U7.9 X1.1 | length 10.8
  Top Layer w0.7: C4.2 95.64,-23.74 X1.1 U7.9
NetC5_2: C5.2 R19.2 U8.5 | length 107.7
  Bottom Layer w0.7: U8.5 64.338,3.604 64.338,-5.531 69.164,-10.357 111.66,-10.357 112.039,-9.978 147.578,-9.978 R19.2 149.509,-10.851 153.531,-10.851 C5.2
NetD1_1: D1.1 R15.1 | length 15.6
  Bottom Layer w0.7: R15.1 211.84,31.5 D1.1
NetD1_2: D1.2 U7.24 | length 225.9
  Top Layer w0.7: U7.24 83.316,-6.676 76.2,-6.676 72.009,-2.485 72.009,1.147 83.312,12.45 83.82,12.45 85.115,13.746 85.115,22.128 89.025,26.037 89.025,28.145 88.265,28.905 82.731,28.905 81.542,30.094 81.542,31.077 82.702,32.237 100.051,32.237 v1(101.93,34.117) ; D1.2 v1(220.27,47.35)
  Bottom Layer w0.7: v1(101.93,34.117) 101.93,36.25 113.03,47.35 v1(220.27,47.35)
NetD2_1: D2.1 R16.1 | length 17.6
  Bottom Layer w0.7: R16.1 217.83,24.6 D2.1
NetD2_2: D2.2 U7.25 | length 194.2
  Top Layer w0.7: U7.25 v1(86.008,-11.908) ; D2.2 233.858,24.912 v1(233.858,1.376)
  Bottom Layer w0.7: v1(86.008,-11.908) 87.889,-13.789 111.076,-13.789 113.601,-16.315 136.614,-16.315 137.287,-15.642 159.233,-15.642 160.757,-14.118 198.323,-14.118 205.689,-6.752 225.73,-6.752 v1(233.858,1.376)
NetD3_11: D3.11 U8.1 | length 17
  Top Layer w0.7: v1(58.581,27.48) 58.581,19.522 U8.1
  Bottom Layer w0.7: v1(58.581,27.48) D3.11
NetD3_12: D3.12 U8.18 | length 10
  Top Layer w0.7: D3.12 68.3,26.78 U8.18
NetD3_13: D3.13 U8.17 | length 69.5
  Top Layer w0.7: v1(81.534,3.433) 87.122,9.021 87.122,21.747 90.125,24.75 90.125,29.57 89.211,30.484 v1(83.414,30.484)
  Bottom Layer w0.7: U8.17 77.222,6.278 78.689,6.278 v1(81.534,3.433) ; D3.13 73.104,30.484 v1(83.414,30.484)
NetD3_14: D3.14 U8.16 | length 20.4
  Top Layer w0.7: v1(66.726,25.862) 66.726,14.234 U8.16
  Bottom Layer w0.7: v1(66.726,25.862) 70.982,25.862 D3.14
NetD3_15: D3.15 U8.15 | length 20.2
  Top Layer w0.7: U8.15 69.723,11.543 69.723,22.103 D3.15
NetD3_16: D3.16 U8.14 | length 23.9
  Top Layer w0.7: U8.14 70.915,10.195 70.915,21.364 73.355,23.804 D3.16
NetD3_17: D3.17 U8.13 | length 44
  Top Layer w0.7: U8.13 65.626,7.714 65.626,21.958 63.094,24.49 63.094,28.3 64.632,29.838 77.742,29.838 D3.17
NetD3_18: D3.18 U8.12 | length 54.3
  Top Layer w0.7: U8.12 64.326,6.474 64.326,21.123 60.674,24.774 60.674,29.579 62.23,31.135 78.945,31.135 D3.18
NetD3_19: D3.19 U8.11 | length 35.2
  Top Layer w0.7: U8.11 72.015,3.675 72.015,15.6 72.802,16.387 74.007,16.387 D3.19
NetD3_20: D3.20 U8.10 | length 117.1
  Top Layer w0.7: U8.10 73.254,-7.534 v1(73.254,-20.773)
  Bottom Layer w0.7: v1(73.254,-20.773) 57.328,-20.773 53.975,-17.42 53.975,23.525 54.812,24.362 68.224,24.362 68.624,24.762 72.796,24.762 73.617,25.582 85.702,25.582 D3.20
NetR1_1: R1.1 U1.12 | length 90.8
  Top Layer w0.7: R1.1 116.396,-8.404 v1(119.083,-8.404) ; U1.12 151.769,25.201 157.429,25.201 161.976,20.655 161.976,-4.491 v1(158.267,-8.2)
  Bottom Layer w0.7: v1(119.083,-8.404) 158.063,-8.404 v1(158.267,-8.2)
NetR1_2: R1.2 SD1.1 | length 194.2
  Top Layer w0.7: R1.2 v1(124.515,-32.635) ; v1(216.002,18.673) 225.476,18.673 228.549,15.6 228.549,-19.241 224.655,-23.135 224.655,-29.772 v1(221.793,-32.635)
  Bottom Layer w0.7: v1(124.515,-32.635) v1(221.793,-32.635) ; SD1.1 203.64,17.48 214.808,17.48 v1(216.002,18.673)
NetR2_1: R2.1 SD2.5 | length 204.6
  Top Layer w0.7: R2.1 v1(129.137,-34.717) ; SD2.5 211,16.364 215.265,20.629 227.305,20.629 231.902,16.032 v1(231.902,-13.991)
  Bottom Layer w0.7: v1(129.137,-34.717) 233.832,-34.717 238.43,-30.12 238.43,-20.519 v1(231.902,-13.991)
NetR2_2: R2.2 U2.14 | length 192.7
  Top Layer w0.7: v1(105.766,-26.589) 105.766,-21.574 R2.2 ; v1(124.257,30.18) 126.47,30.18 U2.14
  Bottom Layer w0.7: v1(105.766,-26.589) 104.75,-27.605 89.093,-27.605 80.686,-19.198 58.141,-19.198 55.093,-16.15 55.093,21.29 57.065,23.262 68.926,23.262 69.326,23.662 78.721,23.662 79.435,24.375 109.308,24.375 113.259,28.325 118.288,28.325 120.142,30.18 v1(124.257,30.18)
NetR3_1: R3.1 U1.13 | length 88.6
  Top Layer w0.7: R3.1 124.14,-5.74 124.14,22.016 121.92,24.236 120.015,24.236 118.999,23.22 v1(118.999,19.385) ; v1(136.168,18.799) 136.168,25.555 137.489,26.876 140.298,26.876 141.722,28.3 151.21,28.3 U1.13
  Bottom Layer w0.7: v1(118.999,19.385) 119.585,18.799 v1(136.168,18.799)
NetR3_2: R3.2 SD1.2 | length 126.5
  Top Layer w0.7: R3.2 v1(124.067,-27.107) ; v1(197.866,-25.7) 197.866,-16.302 202.565,-11.603 202.565,11.055 SD1.2
  Bottom Layer w0.7: v1(124.067,-27.107) 196.46,-27.107 v1(197.866,-25.7)
NetR4_1: R4.1 SD2.4 | length 167.7
  Top Layer w0.7: R4.1 133.98,-34.48 161.673,-34.48 164.84,-31.314 216.281,-31.314 223.555,-24.04 223.555,-21.365 227.432,-17.488 227.432,13.898 224.333,16.997 215.537,16.997 SD2.4
NetR4_2: R4.2 U2.15 | length 47.8
  Top Layer w0.7: R4.2 122.923,-9.497 125.73,-9.497 127.154,-8.073 127.154,0.335 125.705,1.784 v1(125.705,23.626)
  Bottom Layer w0.7: v1(125.705,23.626) 127.138,25.06 130.81,25.06 U2.15
NetR5_1: R5.1 U1.15 | length 94.6
  Top Layer w0.7: v1(134.722,-14.815) 135.993,-16.086 160.833,-16.086 169.445,-7.474 v1(169.445,22.392)
  Bottom Layer w0.7: R5.1 125.242,-13.042 132.949,-13.042 v1(134.722,-14.815) ; U1.15 162.197,22.392 v1(169.445,22.392)
NetR5_2: R5.2 SD1.4 | length 105.5
  Top Layer w0.7: v1(189.611,-21.713) 189.611,5.669 193.54,9.598 SD1.4
  Bottom Layer w0.7: R5.2 125.023,-22.983 150.012,-22.983 151.282,-21.713 v1(189.611,-21.713)
NetR6_1: R6.1 SD2.2 | length 144.8
  Top Layer w0.7: R6.1 135.812,-31.232 146.369,-31.232 148.517,-33.38 160.573,-33.38 163.944,-30.01 214.74,-30.01 217.653,-27.097 217.653,-19.325 222.555,-14.423 222.555,11.065 SD2.2
NetR6_2: R6.2 U2.13 | length 214.8
  Top Layer w0.7: v1(53.67,30.985) 53.67,-11.98 55.367,-13.677 57.547,-13.677 66.209,-22.338 66.209,-25.04 69.869,-28.7 107.206,-28.7 110.877,-25.029 110.877,-19.09 116.053,-13.915 123.585,-13.915 R6.2 ; v1(115.164,30.256) 115.164,32.262 115.545,32.643 118.762,32.643 122.743,28.663 125.447,28.663 U2.13
  Bottom Layer w0.7: v1(53.67,30.985) 55.025,32.34 84.671,32.34 87.323,29.688 114.596,29.688 v1(115.164,30.256)
NetR7_1: R7.1 U1.14 | length 254.9
  Top Layer w0.7: R7.1 128.66,-14.88 123.385,-20.155 112.035,-20.155 112.035,-26.657 108.892,-29.8 69.29,-29.8 52.17,-12.68 52.17,32.485 57.434,37.749 138.689,37.749 140.03,36.408 140.03,31.74 150.31,31.74 U1.14
NetR7_2: R7.2 SD1.5 | length 158.1
  Top Layer w0.7: R7.2 136.986,-29.866 147.65,-29.866 150.065,-32.28 159.053,-32.28 162.89,-28.444 212.954,-28.444 215.24,-26.158 215.24,-6.549 209.601,-0.91 209.601,2.265 212.598,5.262 v1(212.598,11.866)
  Bottom Layer w0.7: SD1.5 193.524,12.476 211.988,12.476 v1(212.598,11.866)
NetR8_1: R8.1 SD2.1 | length 148.9
  Top Layer w0.7: R8.1 138.417,-28.757 148.999,-28.757 151.023,-30.78 v1(151.689,-30.78) ; SD2.1 224.206,11.954 v1(224.206,-12.086)
  Bottom Layer w0.7: v1(151.689,-30.78) 226.06,-30.78 228.956,-27.885 228.956,-16.836 v1(224.206,-12.086)
NetR8_2: R8.2 U2.12 | length 40.7
  Top Layer w0.7: U2.12 128.058,23.512 128.058,17.47 128.254,17.274 128.254,-8.434 R8.2
NetR9_1: R9.1 U1.9 | length 200.9
  Top Layer w0.7: R9.1 139.857,-27.657 150.099,-27.657 150.649,-28.207 160.927,-28.207 161.808,-27.325 208.28,-27.325 209.86,-25.745 209.86,-4.674 208.457,-3.272 208.457,2.942 209.652,4.136 209.652,13.619 209.601,13.67 209.601,17.962 v1(211.76,20.121)
  Bottom Layer w0.7: U1.9 144.13,28.22 161.9,28.22 162.81,27.309 180.128,27.309 184.089,23.348 195.148,23.348 197.613,20.883 210.998,20.883 v1(211.76,20.121)
NetR9_2: R9.2 SD1.6 | length 74.4
  Top Layer w0.7: SD1.6 191,-6.338 v1(194.462,-9.8)
  Bottom Layer w0.7: R9.2 136.24,-13.88 158.411,-13.88 162.164,-10.127 194.135,-10.127 v1(194.462,-9.8)
NetR10_1: R10.1 SD2.9 | length 103.5
  Top Layer w0.7: R10.1 140.288,-25.548 143.625,-25.548 144.634,-26.557 151.199,-26.557 151.749,-27.107 159.827,-27.107 160.708,-26.225 192.922,-26.225 196.647,-22.5 196.647,-15.871 200.609,-11.908 v1(200.609,-5.279)
  Bottom Layer w0.7: v1(200.609,-5.279) 213.581,-5.279 SD2.9
NetR10_2: R10.2 U2.11 | length 56.9
  Top Layer w0.7: R10.2 136.28,15.812 138.887,18.419 138.887,24.363 v1(139.522,24.998)
  Bottom Layer w0.7: U2.11 123.81,28.22 136.3,28.22 v1(139.522,24.998)
NetR11_1: R11.1 U1.11 | length 164.6
  Top Layer w0.7: R11.1 141.713,-24.433 144.273,-24.433 145.023,-25.183 v1(153.7,-25.183) ; v1(200.533,19.105) 204.724,14.914 204.724,-15.819 v1(200.584,-19.96)
  Bottom Layer w0.7: U1.11 151.022,23.408 156.53,23.408 159.614,20.324 194.208,20.324 195.428,19.105 v1(200.533,19.105) ; v1(153.7,-25.183) 154.524,-26.007 194.537,-26.007 v1(200.584,-19.96)
NetR11_2: R11.2 SD1.9 | length 66.5
  Bottom Layer w0.7: R11.2 140.22,-12.78 157.573,-12.78 161.326,-9.027 191.374,-9.027 198.62,-1.782 SD1.9
NetR12_1: R12.1 SD2.6 | length 97
  Top Layer w0.7: SD2.6 216.764,-6.004 v1(216.764,-17.598)
  Bottom Layer w0.7: R12.1 142.745,-20.155 177.142,-20.155 177.382,-20.395 186.735,-20.395 187.966,-19.164 198.078,-19.164 199.644,-17.598 v1(216.764,-17.598)
NetR12_2: R12.2 U2.9 | length 177.8
  Top Layer w0.7: U2.9 117.23,30.932 v1(117.424,31.126) ; R12.2 139.775,-12.965 134.025,-12.965 133.222,-13.768 133.222,-16.428 133.985,-17.191 162.281,-17.191 170.712,-8.76 170.712,20.508 171.328,21.124 171.328,42.672 v1(168.199,45.801)
  Bottom Layer w0.7: v1(117.424,31.126) 115.722,32.828 115.722,39.384 122.139,45.801 v1(168.199,45.801)
NetR13_1: R13.1 U1.10 | length 42.8
  Top Layer w0.7: R13.1 138.915,-6.395 138.915,16.395 140.005,17.485 140.005,21.555 U1.10
NetR13_2: R13.2 SD1.7 | length 80
  Top Layer w0.7: R13.2 146.385,-24.025 151.639,-24.025 152.529,-23.135 153.973,-23.135 156.845,-26.007 159.158,-26.007 160.776,-24.389 192.227,-24.389 193.481,-23.135 193.481,-15.734 198.069,-11.146 198.069,-4.769 SD1.7
NetR14_1: R14.1 SD2.7 | length 83
  Top Layer w0.7: R14.1 147.825,-22.925 150.368,-22.925 151.98,-21.313 165.652,-21.313 169.545,-17.42 v1(169.545,-12.569)
  Bottom Layer w0.7: v1(169.545,-12.569) 195.428,-12.569 196.469,-11.527 196.469,-6.219 198.933,-3.755 210.025,-3.755 SD2.7
NetR14_2: R14.2 U2.10 | length 67.2
  Top Layer w0.7: v1(144.71,23.296) 144.71,20.61 140.015,15.915 140.015,-4.955 R14.2
  Bottom Layer w0.7: U2.10 124.384,22.106 126.417,22.106 128.27,23.96 137.561,23.96 138.022,23.498 144.508,23.498 v1(144.71,23.296)
NetR17_1: R17.1 R18.1 U8.8 | length 19.1
  Top Layer w0.7: R18.1 R17.1
  Bottom Layer w0.7: U8.8 61.773,-1.45 61.773,-4.953 R17.1
NetR18_2: R18.2 U8.6 U8.7 | length 23.4
  Top Layer w0.7: U8.7 U8.6
  Bottom Layer w0.7: R18.2 56.21,-14.63 56.21,-1.652 U8.7
NetR19_1: R19.1 U7.16 | length 50.2
  Top Layer w0.7: U7.16 105.8,-9.987 v1(108.102,-12.289) ; v1(130.937,-14.804) 130.937,-16.607 133.35,-19.02 146.46,-19.02 R19.1
  Bottom Layer w0.7: v1(108.102,-12.289) 112.166,-12.289 114.681,-14.804 v1(130.937,-14.804)
NetRP4_2: RP4.2 U2.7 U6.15 | length 154.4
  Top Layer w0.7: v1(208.128,10.749) v1(208.128,43.896)
  Bottom Layer w0.7: U2.7 129.326,43.896 v1(208.128,43.896) ; U6.15 184.58,15 RP4.2 191.046,11.074 207.802,11.074 v1(208.128,10.749)
NetRP4_3: RP4.3 U2.1 U6.1 | length 116.1
  Top Layer w0.7: U6.1 174.42,16.005 ; v1(181.077,31.018) 174.65,24.592 174.65,19.555 ; RP4.3 188.515,13.855 188.515,33.643 187.738,34.42 183.21,34.42 181.078,32.287 181.078,25.982 174.65,19.555 ; 174.42,16.005 174.42,17.002 174.628,17.21 174.628,19.532 174.65,19.555 ; 174.42,16.005 174.65,16.235 174.65,19.555
  Bottom Layer w0.7: U2.1 138.353,30.997 141.398,30.997 141.874,30.522 167.861,30.522 168.357,31.018 v1(181.077,31.018)
NetRP4_4: RP4.4 U2.2 U6.2 | length 182.3
  Top Layer w0.7: U6.2 175.26,12.46 176.327,13.527 176.327,18.8 182.702,25.176 v1(182.702,29.341)
  Bottom Layer w0.7: U2.2 132.47,35.319 132.994,35.844 137.947,35.844 140.97,32.821 142.058,32.821 143.257,31.622 166.212,31.622 167.335,32.745 182.143,32.745 182.778,32.11 v1@182.778,29.341 ; v1(182.702,29.341) v1@182.778,29.341 ; v1@182.778,29.341 182.778,26.268 184.582,24.465 197.104,24.465 198.501,23.068 218.44,23.068 222.555,18.953 222.555,13.06 218.719,9.225 202.727,9.225 ; 202.727,9.225 187.815,9.225 RP4.4 202.727,9.225
NetRP4_5: RP4.5 U2.6 U6.3 | length 128.4
  Top Layer w0.7: U6.3 172.92,11.42 172.92,17.91 173.528,18.517 173.528,25.691 174.151,26.314 ; v1(177.157,29.32) 174.151,26.314 ; RP4.5 189.615,9.875 189.615,35.516 189.611,35.52 182.11,35.52 173.528,26.937 174.151,26.314
  Bottom Layer w0.7: U2.6 126.753,29.897 140.298,29.897 140.876,29.32 v1(177.157,29.32)
NetRP4_6: RP4.6 U1.7 U6.4 | length 119.2
  Top Layer w0.7: U1.7 150.103,39.273 165.1,39.273 167.945,36.428 v1(167.945,8.64) ; U6.4 178.654,7.38 179.324,6.71 179.324,-14.082 183.932,-18.69 185.165,-18.69 186.182,-17.673 186.182,-4.608 185.735,-4.161 185.735,3.455 RP4.6
  Bottom Layer w0.7: v1(167.945,8.64) 169.205,7.38 U6.4
NetRP4_7: RP4.7 U1.1 U6.5 | length 200.6
  Top Layer w0.7: U6.5 171.82,7.44 171.82,18.802 172.428,19.41 172.428,29.43 v1(180.061,37.063)
  Bottom Layer w0.7: U1.1 163.133,37.063 ; v1(180.061,37.063) 163.133,37.063 ; RP4.7 192.8,7.98 229.108,7.98 231.648,10.52 231.648,34.472 227.025,39.095 165.165,39.095 163.133,37.063
NetRP4_8: RP4.8 U1.2 U6.6 | length 212.1
  Top Layer w0.7: U6.6 174.995,2.875 178.206,2.875 178.206,-15.723 182.421,-19.938 187.296,-19.938 188.505,-18.729 188.505,-1.625 RP4.8
  Bottom Layer w0.7: U1.2 157.87,37.377 160.909,40.416 227.889,40.416 232.766,35.539 232.766,7.98 230.099,5.313 192.673,5.313 RP4.8
NetRP4_9: RP4.9 U1.6 U6.7 | length 129.4
  Top Layer w0.7: U1.6 151.17,37.8 162.56,37.8 166.443,33.916 v1(166.443,10.15) ; U6.7 172.898,-1.762 172.898,-5.212 173.713,-6.027 173.713,-20.014 176.989,-23.289 191.111,-23.289 192.049,-22.35 192.049,-15.109 195.986,-11.172 195.986,-5.05 v1(192.938,-2.002)
  Bottom Layer w0.7: v1(166.443,10.15) 166.443,7.737 U6.7 ; RP4.9 187.898,-2.002 v1(192.938,-2.002)
NetSW1_1: SW1.1 U7.4 | length 190.8
  Top Layer w0.7: v1(80.569,-21.611) 82.94,-19.24 U7.4
  Bottom Layer w0.7: v1(80.569,-21.611) 88.214,-29.256 222.91,-29.256 227.432,-24.735 227.432,-20.468 222.682,-15.718 222.682,-9.8 209.628,-9.182 SW1.1
NetSW2_1: SW2.1 U7.5 | length 139.8
  Bottom Layer w0.7: U7.5 87.034,-14.906 109.039,-14.906 111.548,-17.415 139.215,-17.415 139.775,-16.855 173.401,-16.855 175.005,-15.252 213.073,-15.252 217.175,-11.15 SW2.1
NetU3_1: U3.1 U4.1 U5.1 U7.18 | length 158.2
  Top Layer w0.7: U3.1 92.593,18.953 101.524,18.953 103.251,17.226 103.251,11.257 100.278,8.283 100.278,5.213 v1(102.235,3.256) ; v1(120.523,22.509) 121.217,22.509 122.64,21.086 U4.1 ; v1(155.79,21.112) 156.64,20.262 U5.1
  Bottom Layer w0.7: U3.1 96.022,22.382 ; U7.18 102.235,-7.325 v1(102.235,3.256) ; v1(120.523,22.509) 96.149,22.509 96.022,22.382 ; v1(155.79,21.112) 154.594,22.308 149.402,22.308 148.889,21.795 143.516,21.795 142.913,22.398 137.384,22.398 136.922,22.86 129.54,22.86 127.687,21.006 123.105,21.006 121.729,22.382 96.022,22.382
NetU3_2: U3.2 U4.2 U5.2 U6.11 U7.6 | length 294.6
  Top Layer w0.7: v1(60.081,20.664) 63.226,17.519 63.226,-0.306 70.791,-7.871 70.791,-21.944 72.371,-23.524 80.956,-23.524 U7.6 ; U3.2 89.535,12.46 94.675,17.6 99.651,17.6 101.74,15.511 v1(101.74,12.895) ; U5.2 160.452,8.648 v1(160.452,-1.977) ; v1(157.658,-24.507) 159.499,-22.665 167.275,-22.665 172.212,-17.728 v1(172.212,-7.514)
  Bottom Layer w0.7: v1(60.081,20.664) 61.578,22.162 70.426,22.162 70.443,22.179 79.439,22.179 80.535,23.275 84.405,23.275 86.055,21.625 86.055,14.213 87.808,12.46 U3.2 ; U7.6 95.711,-24.151 151.333,-24.151 152.654,-22.83 155.981,-22.83 v1(157.658,-24.507) ; v1(101.74,12.895) 103.18,12.895 104.998,11.077 121.257,11.077 U4.2 ; v1(160.452,-1.977) 162.992,-4.517 175.223,-4.517 ; v1(172.212,-7.514) 172.226,-7.514 175.223,-4.517 ; U6.11 175.223,-4.517